# EAGLE board CR123aBoost (EAGLE 5.10)
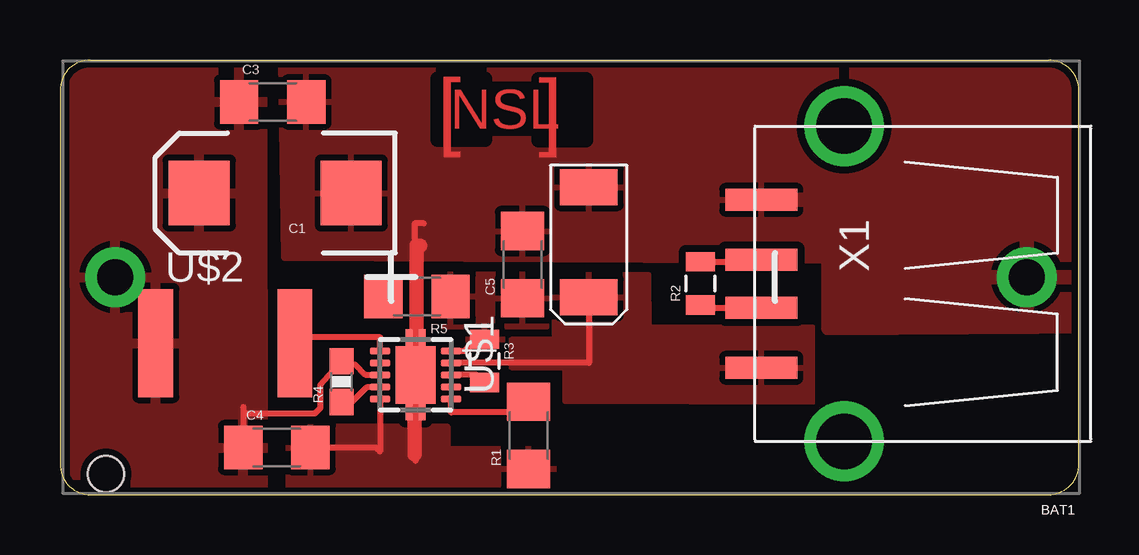
[diagram p0: board, top side]

Size 42.47 x 18.11 mm. Coordinates in mm from the lower left corner, seen from the top.
Outline: 42.47,16.84 arc90 41.2,18.11 1.27,18.11 arc90 0,16.84 0,1.27 arc90 1.27,0 41.2,0 arc90 42.47,1.27 42.47,16.84
Copper layers (1*16): Top 0.0356mm / dielectric 1.5011mm / Bottom 0.0356mm
Design rules "SparkFun-mod": minimum track width 8mil, minimum drill 20mil, track to track 12mil, track to pad 12mil, pad to pad 8mil, via to via 8mil, smd to smd 8mil, copper to edge 12mil, drill to drill 8mil, minimum pad ring 12mil, minimum via ring 10mil, stop-mask expansion 4mil, vias tented up to drill 25mil, thermal gap 10mil

## Footprints (pad centres in the part's own frame; a part is rotated, then mirrored left to right if it is on the bottom)
BATTERY_CR123A = drill 1.5 pad 2.5 round: + 19,0; - -19,0 | hole 1.5: 19.4,8.2; 19.4,8.2
EIA7343 = smd 2.55 x 2.7: A 3.17,0; C -3.17,0
EIA6032 = smd 1.5 x 2.4: P$1 -2.3,0; P$2 2.3,0
1206 = smd 1.6 x 1.8: 1 -1.4,0; 2 1.4,0
0805 = smd 0.8 x 1.2: 1 -0.9,0; 2 0.9,0
0603-RES = smd 1.1 x 1: 1 -0.85,0; 2 0.85,0
SON-10 = smd 0.28 x 0.85: 1 -1,-1.475; 2 -0.5,-1.475; 3 0,-1.475; 4 0.5,-1.475; 5 1,-1.475; 6 1,1.475; 7 0.5,1.475; 8 0,1.475; 9 -0.5,1.475; 10 -1,1.475 | smd 2.4 x 1.65: TH 0,0 | smd 3.8 x 0.28: TH@1 0,0.275; TH@2 0,-0.275
INDUCTOR-SD6603 = smd 1.45 x 4.5: 1 -2.92,0; 2 2.88,0
KSUBX-SMT-AS1N = smd 3 x 0.9: D+ 3.45,-1; D- 3.45,1; GND 3.45,-3.5; VBUS 3.45,3.5 | drill 2.311 round: P$5 0,-6.566; P$6 0,6.566

## Placement (x,y rotation side)
BAT1  [BATTERY_CR123A]  21.31,9.07 180 top
C1  470uF  [EIA7343]  8.97,12.56 180 top
C2  [EIA6032]  22.04,10.52 90 top
C3  10uF  [1206]  8.87,16.36 0 top
C4  .1uF  [1206]  9.04,1.96 0 top
C5  22uF  [1206]  19.28,9.58 90 top
R1  34.8K  [1206]  19.53,2.47 90 top
R2  100R  [0805]  26.69,8.8 90 top
R3  10K  [0805]  17.69,5.57 270 top
R4  10K  [0603-RES]  11.73,4.71 90 top
R5  10K  [1206]  14.88,8.26 180 top
U$1  TPS2500SON10  [SON-10]  14.82,4.99 270 top
U$2  INDUCTOR  [INDUCTOR-SD6603]  6.91,6.32 0 top
X1  USBKUSBX-SMT-AS1N  [KSUBX-SMT-AS1N]  32.69,8.79 180 top

## Library data of the parts
BAT1 = tvbgone-adj
C1 = SparkFun
C2-C5 R1-R5 U$1 U$2 X1 = CR123aBoost

## Nets
AGND: C4.2 R1.1 U$1.5
AUX: C5.1 R3.1 R5.1 U$1.10
EN: R4.1 U$1.4
FAULT: R3.2 U$1.8
ILM: R1.2 U$1.6
N$1: R5.2
N$9: R2.1 X1.D-
N$10: R2.2 X1.D+
PGND: BAT1.- C1.C C2.P$2 C3.2 C5.2 X1.GND
SW: U$1.1 U$2.2
USB: C2.P$1 U$1.9 X1.VBUS
VCC: BAT1.+ C1.A C3.1 C4.1 R4.2 U$1.3 U$2.1

## Tracks (layer width: path | path; a pad name or v marks a point on that pad's centre or on a via)
AGND
  Top 0.254: U$1.5 13.34,3.98 13.34,1.8 13.17,1.96 C4.2 | 14.86,5.08 14.81,5.08 14.81,1.42 14.83,1.42
  Top 0.61: 14.86,4.27 arc90 14.78,4.19 14.78,1.68
  pour Top: 20.57,1.93 20.57,-0.18 9.53,-0.18 9.53,2.84 13.28,2.84 16.15,2.84 16.15,1.9
AUX
  Top 0.254: R3.1 17.44,6.22 17.09,6.22 16.86,5.99 U$1.10
  pour Top: 15.95,7.01 17.02,7.01 17.02,6.12 18.44,6.12 18.44,7.01 20.29,7.01 20.29,9.17 15.93,9.17
EN
  Top 0.254: U$1.4 13.33,4.47 12.78,4.47 12.03,3.73 R4.1
FAULT
  Top 0.254: R3.2 17.37,4.99 U$1.8
ILM
  Top 0.254: R1.2 19.09,3.43 16.31,3.43 16.3,3.44 U$1.6
N$9
  Top 0.254: R2.1 26.81,7.79 X1.D-
N$10
  Top 0.254: X1.D+ 29.15,9.7 R2.2
PGND
  Top 0.254: 14.78,5.16 14.78,11.3 15.16,11.3
  Top 0.61: 14.86,6.1 14.86,10.36 15.01,10.36
  pour Top: 31.78,9.73 9.35,9.86 9.17,20.95 31.39,20.95
  pour Top: 43.71,7.01 32.03,6.93 32.03,10.69 30.12,10.72 30.15,18.47 43.89,18.47 46.53,8.31
SW
  Top 0.254: U$1.1 13.35,6.54 13.34,6.55 10.03,6.55 U$2.2
USB
  Top 0.254: U$1.9 22.04,5.49 C2.P$1
  pour Top: 31.37,6.96 24.56,6.98 24.54,9.14 20.62,9.14 20.62,6.45 18.82,6.45 18.82,5.31 21.06,5.31 21.06,3.91 31.37,3.86
VCC
  Top 0.254: U$1.3 12.73,5 12.3,5.43 R4.2 10.85,4.57 10.85,3.61 10.62,3.38 7.72,3.38 7.7,3.4 7.64,3.65 C4.1
  pour Top: 0.71,17.73 8.43,17.73 8.46,-0.56 0.64,-0.56 0.61,17.78

## Text on the board
Top: [ | NSL | ]
tKeepout: NSL | ]